# Altium PCB SAMV71_Xplained_Ultra.PcbDoc (part 3 of 7)
Units mm, origin at the board's own origin, x right, y up, seen from the top; angles counter-clockwise.
Board outline 90 x 135 mm, 8 copper layers (Top Layer LF-Signals, Ground Plane 1 (GND), Power Plane (VCC), Ground Plane 2 (GND), Signal Layer 1, Signal Layer 2, Ground Plane 3 (GND), Bottom Layer LF-Signals), stack 1.588 mm thick; 391 components, 330 nets, 1782 pads, 966 vias.
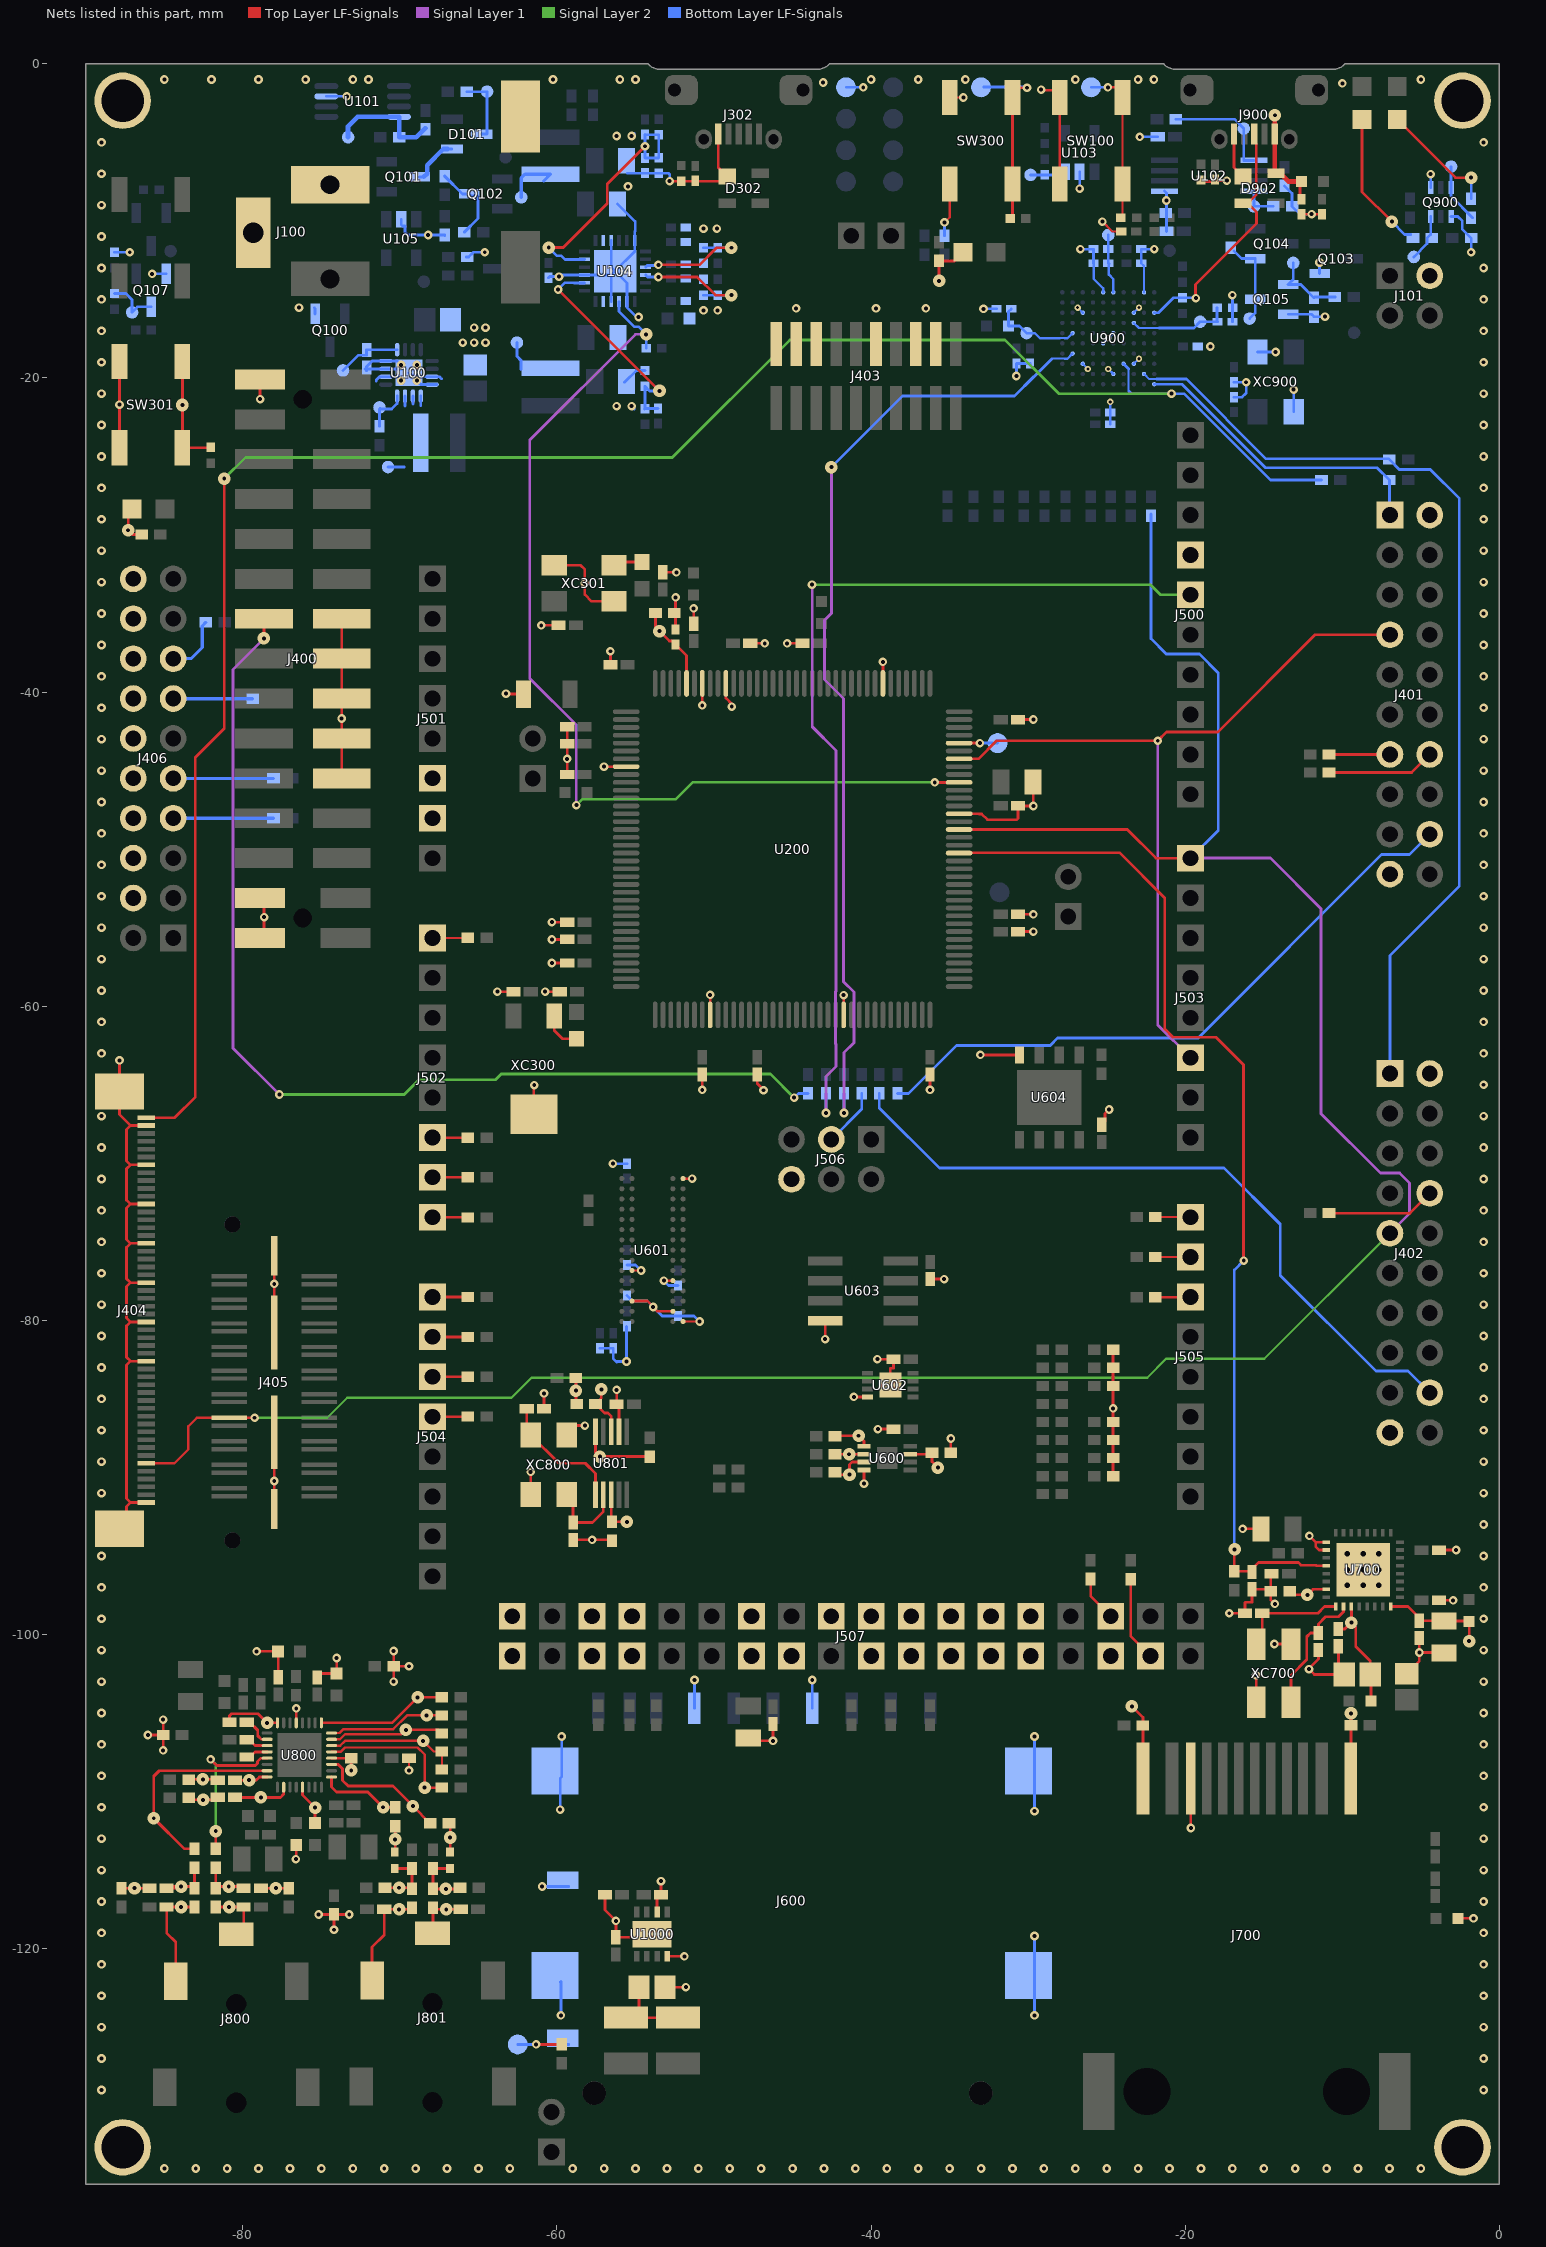
[diagram p9: the nets of this part, all layers, seen from the top]

## Via types
v1: diameter 0.55, hole 0.25, Top Layer LF-Signals to Bottom Layer LF-Signals, 547 vias
v2: diameter 0.55, hole 0.25, Top Layer LF-Signals to Bottom Layer LF-Signals, tented both sides, 190 vias
v3: diameter 0.55/0.55/0.55/0.8 (per signal layer), hole 0.25, Top Layer LF-Signals to Bottom Layer LF-Signals, tented top, 172 vias
v4: diameter 0.55, hole 0.25, Top Layer LF-Signals to Bottom Layer LF-Signals, tented top, 21 vias
v5: diameter 0.4, hole 0.2, Top Layer LF-Signals to Bottom Layer LF-Signals, tented both sides, 16 vias
v6: diameter 0.7, hole 0.35, Top Layer LF-Signals to Bottom Layer LF-Signals, 9 vias
v7: diameter 0.4, hole 0.2, Top Layer LF-Signals to Bottom Layer LF-Signals, tented top, 5 vias
v8: diameter 0.66, hole 0.33, Top Layer LF-Signals to Bottom Layer LF-Signals, tented top, 4 vias
v9: diameter 0.4, hole 0.2, Top Layer LF-Signals to Bottom Layer LF-Signals, 2 vias

## Nets (pads, with @x,y where several pads share a name; then routed paths per layer and width w, separated by ;. In a path a pad name is that pad's centre, name@x,y a point inside that pad or via, vN(x,y) a via of type N, cw(c..) or ccw(c..) an arc to the next point about the centre after c; other vN are vias at no path point) (continued)
EDBG_USB_HS_P: D902.2 J900.3 R917.1 U900.A8 | length 15.3
  Top Layer LF-Signals w0.175: D902.2@-15.975,-8.828 -15.475,-8.328 -15.475,-5.1 J900.3@-15.575,-5
  Top Layer LF-Signals w0.18: v1(-19.325,-14.925) -19.352,-14.898 -19.352,-14.053 -15.475,-10.176 -15.475,-9.428 -15.935,-8.968 -16.235,-8.968 D902.2@-16.325,-8.878
  Bottom Layer LF-Signals w0.18: U900.A8@-21.975,-15.85 -21.7,-15.85 -20.75,-14.9 R917.1@-20.175,-14.9 -19.35,-14.9 v1(-19.325,-14.925)
GND: C100.2 C101.2 C102.2 C103.2 C104.2 C105.2 C106.2 C107.2 C108.2 C109.2 C110.2 C111.2 C112.2 C113.2 C115.2 C117.2 C118.2 C119.2 C120.2 C200.2 C201.2 C202.2 C203.2 C204.2 C205.2 C206.2 C207.2 C208.2 C209.2 C210.2 C211.2 C212.2 C213.2 C214.2 C215.2 C216.2 C217.2 C218.2 C219.2 C300.2 C301.2 C302.2 C303.2 C304.1 C600.2 C601.2 C602.2 C603.2 C604.2 C605.2 C606.2 C607.2 C608.2 C609.2 C610.2 C611.2 C612.2 C613.2 C700.2 C701.2 C702.2 C703.2 C704.1 C707.2 C708.2 C709.1 C710.2 C711.2 C712.2 C713.2 C800.1 C811.2 C818.2 C819.2 C822.2 C823.2 C824.2 C828.2 C829.2 C900.2 C901.2 C902.2 C903.1 C904.2 C905.2 C906.2 C907.2 C908.2 C909.2 C910.2 C911.2 C912.2 C913.2 C914.2 C915.2 C1000.2 C1001.2 C1002.2 C1003.2 D302.1 D902.1 J100.1 J100.2 J101.2@-4.43,-13.49 J302.5 J400.2 J400.4 J400.9 J400.11 J400.13 J400.15 J400.17 J400.30 J401.2@-4.43,-28.73 J401.19@-6.97,-51.59 J402.2@-4.43,-64.29 J402.19@-6.97,-87.15 J403.3 J403.5 J403.9 J403.15 J403.17 J403.19 J404.0 J404.2 J404.7 J404.12 J404.17 J404.22 J404.27 J404.32 J404.50 J405.41 J405.42 J405.43 J405.44 J406.4@-86.98,-53.114 J406.6@-86.98,-50.574 J406.8@-86.98,-48.034 J406.10@-86.98,-45.494 J406.12@-86.98,-42.954 J406.14@-86.98,-40.414 J406.16@-86.98,-37.874 J406.18@-86.98,-35.334 J406.20@-86.98,-32.794 J500.7@-19.67,-31.27 J501.6@-67.93,-45.494 J501.7@-67.93,-48.034 J506.6@-45.07,-71.021 J507.35 J507.36 J600.3 J600.6 J600.11 J600.13 J600.14 J600.15 J600.16 J700.10 J900.5 L702.1 pad.666 Q100.1 Q103.1 Q105.2 Q107.2 Q900.1 Q900.4 R103.1 R111.1 R116.1 R117.1 R118.1 R119.1 R123.1 R126.2 R130.1 R131.1 R133.1 R135.1 R233.1 R304.1 R603.1 R704.1 R714.2 R715.2 R716.2 R717.2 R718.1 R719.2 R720.2 R814.1 R815.1 R816.1 R818.1 R909.1 R918.1 R919.1 SW100.1 SW100.2 SW300.1 SW300.2 SW301.1 SW301.2 TP900.1 U100.0 U100.6 U100.7 U100.8 U100.15 U100.16 U101.3 U102.5 U103.2 U104.2 U104.4 U104.9 U104.15 U104.18 U104.25 U105.2 U200.8 U200.44 U200.61 U200.95 U200.115 U200.135 U200.138 U600.4 U601.A1 U601.B2 U601.C6 U601.E2 U601.F6 U601.R1 U602.4 U602.9 U603.4 U604.4 U700.25 U700.26 U700.33 U800.5 U801.2 U900.B10 U900.C3 U900.C8 U900.E2 U900.E6 U900.F5 U900.F10 U900.H3 U900.H8 U1000.2 U1000.8 U1000.9 XC300.3 XC301.2 XC301.4 XC700.2 XC700.4 XC800.2 XC800.4 XC900.2 XC900.4 | length 347.2
  Top Layer LF-Signals w0.15: v1(-69.425,-108.65) C800.1@-69.425,-107.875 ; U601.F6@-55.222,-76.825 v1(-54.647,-76.825) ; C302.2@-53.275,-32.375 v1(-52.4,-32.375) ; v1(-53.197,-77.475) U601.E2@-52.622,-77.475 ; U601.A1@-51.972,-80.075 v1(-50.922,-80.075) ; U601.R1@-51.972,-70.975 v1(-51.397,-70.975) ; v1(-35.325,-10.1) -35,-9.775 SW300.1@-35,-7.65 ; SW300.2@-35,-2.15 v4(-34.125,-2.15) ; v4@-29.175,-1.675 -28,-1.675 SW100.2@-28,-2.15 SW100.1@-28,-7.65 ; v1(-25.275,-10.05) -24.65,-10.675 C104.2@-24.075,-10.675 ; C907.2@-12.6,-9.575 v2(-11.95,-9.575) C908.2@-11.3,-9.575
  Top Layer LF-Signals w0.175: J404.0@-87.85,-93.27 -87.4,-92.82 -87.4,-91.85 -87.15,-91.6 ; v1(-87.85,-63.45) J404.0@-87.85,-65.43 -87.85,-66.9 -87.15,-67.6 ; SW301.1@-87.85,-24.45 v1(-87.85,-21.7) SW301.2@-87.85,-18.95 ; J404.50@-86.15,-91.6 -87.15,-91.6 ; J404.32@-86.15,-82.6 -87.15,-82.6 ; J404.27@-86.15,-80.1 -87.15,-80.1 ; J404.22@-86.15,-77.6 -87.15,-77.6 ; J404.17@-86.15,-75.1 -87.15,-75.1 ; J404.12@-86.15,-72.6 -87.15,-72.6 ; J404.7@-86.15,-70.1 -87.15,-70.1 ; J404.2@-86.15,-67.6 -87.15,-67.6 ; v1(-86.05,-106.4) R814.1@-85.075,-106.4 ; v1(-85.075,-107.375) R814.1@-85.075,-106.4 ; v1(-85.075,-105.425) R814.1@-85.075,-106.4 ; v1(-79.125,-101.075) C828.2@-77.749,-101.075 ; v1(-78.903,-21.347) J400.30@-78.903,-20.094 ; v1@-78.65,-54.328 J400.4@-78.65,-53.075 ; J400.2@-78.647,-55.398 v1(-78.647,-54.331) ; J405.41@-78,-92.015 J405.42@-78,-87.125 ; J405.43@-78,-80.775 v1(-78,-77.675) J405.44@-78,-75.885 ; C829.2@-77.75,-102.725 C828.2@-77.75,-101.327 ; v1(-76.625,-114.3) -76.6,-114.275 C811.2@-76.6,-113.399 ; U800.5@-76.6,-105.625 v1(-76.6,-104.7) ; C818.2@-75.25,-102.733 -75.001,-102.484 C819.2@-74.025,-102.484 v1(-74.025,-101.5) ; v1(-75.175,-117.825) R815.1@-74.2,-117.825 ; v1(-74.2,-118.8) R815.1@-74.2,-117.825 ; J400.9@-73.708,-45.494 J400.11@-73.708,-42.954 v1(-73.708,-41.684) J400.13@-73.708,-40.414 J400.15@-73.708,-37.874 J400.17@-73.708,-35.334 ; v1(-73.225,-117.825) R815.1@-74.2,-117.825 ; v1(-70.4,-103) R816.1@-70.4,-102.025 ; v1(-70.4,-101.05) R816.1@-70.4,-102.025 ; v1(-69.425,-102.025) R816.1@-70.4,-102.025 ; v1(-63.8,-59.075) C301.2@-62.775,-59.075 ; v1(-63.25,-40.1) -63.225,-40.125 C215.2@-62.125,-40.125 ; XC800.2@-61.675,-91.1 v1(-61.675,-89.65) ; XC300.3@-61.475,-66.875 -61.475,-65.05 v1(-61.45,-65.025) ; v1(-61,-35.75) C303.2@-59.9,-35.75 ; C824.2@-60.825,-85.625 v1(-60.825,-84.65) ; v1(-60.75,-59.075) C300.2@-59.825,-59.075 ; v1(-60.325,-57.25) C210.2@-59.35,-57.25 ; v1(-60.325,-55.75) C201.2@-59.35,-55.75 ; v1(-60.325,-54.65) C209.2@-59.35,-54.65 ; XC301.4@-60.175,-31.925 -58.5,-31.925 -58.225,-32.2 v1(-58.225,-33.075) -58.225,-33.8 -57.8,-34.225 XC301.2@-56.375,-34.225 ; XC800.4@-59.375,-87.3 -58.775,-86.7 v1(-58.225,-86.7) ; C218.2@-59.35,-45.25 v1(-59.35,-44.25) C200.2@-59.35,-43.3 C208.2@-59.35,-42.2 ; C823.2@-58.975,-93.975 v1(-57.762,-93.975) -56.55,-93.975 R818.1@-56.5,-94.025 ; v1(-57.003,-44.752) -57.001,-44.75 U200.8@-55.6,-44.75 ; C1001.2@-56.95,-116.58 -56.95,-117.53 v1(-56.25,-118.23) C1003.2@-56.25,-119.28 -54.15,-119.28 U1000.9@-53.95,-119.08 ; C207.2@-56.6,-38.25 v1(-56.6,-37.4) ; v1(-56.2,-84.425) C822.2@-56.2,-85.35 -56.05,-85.5 U801.2@-56.05,-87.1 ; U601.C6@-55.222,-78.775 -54.25,-78.775 v1(-53.875,-79.15) -53.6,-79.425 U601.B2@-52.622,-79.425 ; U1000.2@-53.625,-117.668 -53.625,-116.83 C1002.2@-53.375,-116.58 v1(-53.375,-115.705) ; C1000.2@-53.125,-122.455 -51.805,-122.455 v1(-51.8,-122.45) ; U1000.8@-52.975,-120.492 v1(-51.887,-120.492) ; v1(-52.825,-7.475) -52.822,-7.478 R304.1@-52.1,-7.478 D302.1@-49.459,-7.478 ; C219.2@-52.45,-36.025 v1@-52.45,-33.95 ; C217.2@-51.3,-35.65 v1(-51.3,-34.675) ; v1(-50.75,-65.325) C202.2@-50.75,-64.35 ; v1(-50.75,-40.85) U200.138@-50.75,-39.45 ; U200.44@-50.25,-60.55 v1(-50.25,-59.275) ; J302.5@-49.734,-5.15 -49.734,-6.603 D302.1@-49.159,-7.178 ; U200.135@-49.25,-39.45 -49.25,-40.375 -48.875,-40.75 v1(-48.875,-40.925) ; C612.2@-47.823,-106.582 -47.635,-106.77 v1(-46.248,-106.77) C613.2@-46.248,-105.7 ; C206.2@-47.7,-36.9 v1(-46.775,-36.9) ; C211.2@-47.25,-64.35 -47.25,-64.925 -46.85,-65.325 v1(-46.85,-65.35) ; v1(-45.35,-36.9) C214.2@-44.375,-36.9 ; v1(-42.925,-81.2) U603.4@-42.925,-80.03 ; U200.61@-41.75,-60.55 v1(-41.75,-59.3) ; v1(-41.1,-84.875) U602.4@-40.225,-84.875 ; v1(-40.45,-90.4) U600.4@-40.45,-89.525 ; v1(-39.6,-82.475) C601.2@-38.575,-82.475 -38.575,-83.05 -38.775,-83.05 U602.9@-38.775,-84.125 ; v1(-39.575,-86.925) C600.2@-38.575,-86.925 ; v1(-36.25,-65.325) C203.2@-36.25,-64.35 ; C602.2@-36.225,-77.375 v1(-35.35,-77.375) ; R603.1@-34.925,-88.425 v1(-34.925,-87.525) ; U200.95@-34.4,-47.75 -33.15,-47.75 -33.137,-47.763 -32.962,-47.763 -32.6,-48.125 -30.725,-48.125 -30.65,-48.05 C205.2@-30.65,-47.25 v1(-29.675,-47.25) C216.2@-29.675,-45.743 ; v1(-33.05,-63.1) U604.4@-30.555,-63.1 U604.4@-30.575,-63.12 ; C204.2@-30.65,-55.25 v1(-29.675,-55.25) ; C212.2@-30.65,-54.15 v1(-29.675,-54.15) ; C213.2@-30.65,-41.75 v1(-29.675,-41.75) ; C611.2@-25.325,-67.55 -25.113,-67.338 -25.113,-66.838 v1(-24.85,-66.575) ; R717.2@-24.594,-89.923 R720.2@-24.594,-87.623 R714.2@-24.594,-86.473 v1(-24.594,-85.6) R715.2@-24.594,-83.023 R716.2@-24.594,-81.873 ; v1(-19.645,-112.32) J700.10@-19.645,-109.175 ; R919.1@-19,-7.4 -18.9,-7.5 C903.1@-18.1,-7.5 ; C903.1@-18.1,-7.375 -17.975,-7.5 -17.917,-7.442 v1(-17.348,-7.442) ; v1(-17.2,-98.65) C709.1@-16.2,-98.65 -16.2,-97.975 -16.175,-97.95 -15.75,-97.95 C713.2@-15.75,-97.125 -14.675,-97.125 R704.1@-14.55,-97.25 ; J900.5@-16.9,-4.475 -16.9,-6.603 D902.1@-16.325,-7.178 D902.1@-16.647,-7.5 ; v1(-16.35,-93.275) C712.2@-15.182,-93.275 ; v1(-15.494,-102.591) -15.476,-102.608 XC700.4@-15.476,-104.314 ; C711.2@-14.5,-96.125 -14.55,-96.175 R704.1@-14.55,-97.25 ; v1(-14.326,-100.609) -14.321,-100.614 XC700.2@-13.276,-100.614 ; v1(-14.3,-98.05) -14.55,-97.8 R704.1@-14.55,-97.25 ; v1(-12.1,-93.725) -11.7,-94.125 ; C704.1@-11.525,-101 -11.525,-101.568 -12.126,-102.169 v1(-12.126,-102.205) -11.781,-102.55 C701.2@-9.875,-102.55 -10.25,-102.175 C700.2@-10.25,-100.75 ; U700.26@-11.025,-94.625 -11.475,-94.625 -11.7,-94.4 -11.7,-94.125 ; U700.25@-11.025,-94.125 -11.7,-94.125 ; C703.2@-5.9,-102.5 -5.1,-101.7 v1(-5.1,-101.15) ; C707.2@-5.1,-100.225 v1(-5.1,-101.15) ; C710.2@-3.85,-97.825 v1(-2.95,-97.825) ; C702.2@-3.85,-94.625 v1(-2.75,-94.625) ; C708.2@-3.793,-101.15 v1(-5.1,-101.15) ; C708.2@-3.668,-101.2 C708.2@-3.575,-101.107 ; L702.1@-2.625,-118.075 v1(-1.65,-118.075) ; -87.15,-91.6 -87.4,-91.35 -87.4,-82.85 -87.15,-82.6 ; -87.15,-82.6 -87.4,-82.35 -87.4,-80.35 -87.15,-80.1 ; -87.15,-80.1 -87.4,-79.85 -87.4,-77.85 -87.15,-77.6 ; -87.15,-77.6 -87.4,-77.35 -87.4,-75.35 -87.15,-75.1 ; -87.15,-75.1 -87.4,-74.85 -87.4,-72.85 -87.15,-72.6 ; -87.15,-72.6 -87.4,-72.35 -87.4,-70.35 -87.15,-70.1 ; -87.15,-70.1 -87.4,-69.85 -87.4,-67.85 -87.15,-67.6
  Top Layer LF-Signals w0.185: U200.115@-39.25,-39.45 v1(-39.25,-38.075)
  Bottom Layer LF-Signals w0.15: TP900.1@-41.6,-1.5 v4(-40.5,-1.5) ; v7(-26.85,-15.525) U900.H8@-26.525,-15.85 ; v1(-26.725,-7.95) U103.2@-26.725,-6.875 ; U900.H3@-26.525,-19.1 v5(-26.2,-19.425) ; C906.2@-25.85,-12.7 -25.825,-12.725 -25.825,-13.701 -25.225,-14.301 U900.F10@-25.225,-14.55 ; v7(-24.9,-19.425) U900.E2@-24.575,-19.75 ; U900.C3@-23.275,-19.1 v5(-22.95,-18.775) ; U900.C8@-23.275,-15.85 v7(-22.95,-15.525) ; C910.2@-22.8,-12.7 -22.625,-12.875 U900.B10@-22.625,-14.55
  Bottom Layer LF-Signals w0.175: R131.1@-88.175,-12 v1(-87.2,-12) ; v1(-85.775,-13.375) Q107.2@-84.875,-13.375 ; Q100.1@-75.45,-15.525 -75.4,-15.575 Q100.1@-75.4,-15.925 ; U101.3@-74.687,-2.075 v1(-73.375,-2.075) ; C102.2@-72.226,-19.426 C102.2@-72.125,-19.325 ; C102.2@-72.125,-19.55 C102.2@-72.125,-19.325 ; C102.2@-72.025,-19.425 U100.7@-70.9,-19.425 U100.0@-69.675,-19.425 ; -71.505,-20.205 -71.505,-20.12 -71.31,-19.925 U100.6@-70.9,-19.925 U100.0@-69.675,-19.925 ; U100.0@-70.175,-18.925 U100.8@-70.9,-18.925 -71.762,-18.925 -72.125,-19.287 C102.2@-72.125,-19.325 ; U105.2@-69.92,-9.9 -69.92,-10.237 -69.832,-10.325 -69.679,-10.325 -69.679,-10.724 -69.503,-10.9 v1(-68.2,-10.9) R111.1@-67.15,-10.9 R111.1@-67.15,-10.928 ; U100.0@-69.425,-19.675 U100.0@-69.175,-19.925 ; U100.16@-67.65,-20.425 U100.16@-67.95,-20.425 -68.675,-20.425 v1(-68.925,-20.175) U100.0@-69.175,-19.925 ; -67.345,-20.058 -67.477,-19.925 U100.15@-67.95,-19.925 U100.0@-69.175,-19.925 ; R135.1@-65.778,-12.3 R135.1@-65.725,-12.3 -65.625,-12.3 -65.325,-12 v1(-64.6,-12) ; v1(-60.95,-116.05) J600.11@-59.25,-116.05 ; C108.2@-60.55,-13.625 -60.475,-13.55 v1(-59.875,-13.55) -59.775,-13.45 U104.9@-58.25,-13.45 U104.25@-56.55,-13.45 ; v1(-59.8,-111.15) J600.13@-59.8,-109.15 ; J600.14@-59.79,-122.14 -59.75,-122.1 v1(-59.75,-124.25) ; J600.13@-59.75,-109.1 -59.7,-109.05 v1(-59.7,-106.5) ; C603.2@-57.272,-81.775 C604.2@-56.422,-81.775 -56.422,-82.428 -56.2,-82.65 -56.172,-82.622 -55.575,-82.622 -55.575,-80.403 C605.2@-55.572,-80.4 ; U104.4@-56.55,-15.15 U104.25@-56.55,-13.45 ; U104.15@-56.55,-11.25 -56.55,-12.95 U104.25@-56.3,-13.2 ; v1(-56.447,-70.025) C610.2@-55.547,-70.025 ; C113.2@-56.143,-8.925 -55.025,-10.043 -55.025,-10.642 -55.05,-10.667 U104.18@-55.05,-11.25 -55.05,-11.95 U104.25@-56.3,-13.2 ; C115.2@-55.7,-20.275 -54.95,-19.525 R123.1@-54.4,-19.525 ; C608.2@-55.547,-78.425 -55.197,-78.775 -54.25,-78.775 v1(-53.875,-79.15) -53.3,-79.725 C606.2@-52.297,-79.725 -51.272,-79.725 v1(-50.922,-80.075) ; C609.2@-55.547,-76.475 -54.997,-76.475 v1(-54.647,-76.825) ; C117.2@-55.525,-6.975 R126.2@-53.525,-6.975 -52.9,-6.975 -52.825,-7.05 v1(-52.825,-7.475) ; v1(-55.475,-7.8) -55.45,-7.775 v1@-55.45,-7.75 ; v1@-55.325,-21.875 v1(-55.25,-21.8) v1@-55.075,-21.975 ; v1(-55.25,-4.6) v1@-55.075,-4.425 ; v1@-54.925,-16.15 -54.925,-16.132 v1@-54.932,-16.125 ; v1(-54.8,-16.125) v1@-54.932,-16.125 ; v1(-53.197,-77.475) -52.897,-77.775 C607.2@-52.297,-77.775 ; J600.6@-51.248,-104.7 v1(-51.248,-102.9) ; J600.3@-43.748,-104.7 v1(-43.748,-102.9) ; R103.1@-35.325,-10.95 v1(-35.325,-10.1) ; v2(-32.85,-15.6) C904.2@-32.025,-15.6 ; v2(-30.75,-19.875) C914.2@-30.75,-19.075 C913.2@-29.875,-19.075 ; v1(-29.6,-124.25) v1(-29.6,-119.2) ; v1(-29.6,-111.25) v1(-29.6,-106.5) ; v2(-26.675,-11.8) C905.2@-25.85,-11.8 C906.2@-25.85,-12.7 ; U900.F5@-25.225,-17.8 v5(-24.9,-17.475) U900.E6@-24.575,-17.15 ; C915.2@-24.775,-22.95 C912.2@-24.775,-22.2 v5(-24.775,-21.525) ; v1(-22.9,-4.65) C105.2@-21.75,-4.65 ; C910.2@-22.8,-12.7 C909.2@-22.8,-11.8 v2(-21.975,-11.8) ; U102.5@-21.325,-8.1 -21.2,-8.225 C106.2@-21.2,-10.675 ; C902.2@-17,-16.425 v1@-17,-14.727 ; C902.2@-16.975,-16.4 R918.1@-16.975,-15.525 ; C900.2@-16.9,-21.225 -16.375,-21.225 -16.125,-20.975 v4(-16.125,-20.275) C901.2@-16.9,-20.275 ; XC900.2@-15.4,-18.35 v1(-14.25,-18.35) ; R116.1@-13.675,-7.775 -13.2,-8.25 R118.1@-13.2,-9.075 -12.7,-9.575 v2(-11.95,-9.575) ; Q105.2@-13.45,-15.95 -11.95,-15.95 R119.1@-11.8,-16.1 v4(-11.1,-16.1) ; XC900.4@-13.1,-22.15 v1(-13.1,-20.75) ; Q103.1@-11.45,-13.35 v4(-11.45,-12.65) ; Q900.1@-4.375,-7.875 v4(-4.375,-7.025) ; Q900.4@-3.075,-9.725 -2.65,-9.725 -2.362,-10.012 -2.362,-10.538 R909.1@-1.8,-11.1 v1(-1.8,-12) ; U104.25@-56.55,-13.45 U104.25@-56.3,-13.2 ; U104.25@-56.3,-13.2 -55.55,-13.95 U104.2@-55.55,-15.15 -55.55,-15.507 v1@-54.932,-16.125
  other v1: -78,-90.225 -55.575,-82.625 -52.45,-33.975 -56.2,-21.8 -69.925,-20.175 -69.925,-19.175 -68.925,-19.175 -66,-17.75 -65.275,-17.75 -64.55,-17.75 -65.275,-16.8 -64.55,-16.8 -50.675,-15.7 -49.775,-15.7 -76.425,-15.525 -17.001,-14.726 -50.675,-10.5 -49.825,-10.5 -21.2,-8.7 -56.2,-4.6
  other v2: -85,-134 -83,-134 -81,-134 -79,-134 -77,-134 -75,-134 -73,-134 -71,-134 -69,-134 -67,-134 -65,-134 -63,-134 -59,-134 -57,-134 -55,-134 -53,-134 -51,-134 -49,-134 -47,-134 -45,-134 -43,-134 -41,-134 -39,-134 -37,-134 -35,-134 -33,-134 -31,-134 -29,-134 -27,-134 -25,-134 -23,-134 -21,-134 -19,-134 -17,-134 -15,-134 -13,-134 -11,-134 -9,-134 -7,-134 -5,-134 -89,-129 -1,-129 -89,-127 -1,-127 -89,-125 -1,-125 -89,-123 -1,-123 -89,-121 -1,-121 -89,-119 -1,-119 -89,-117 -1,-117 -89,-115 -1,-115 -89,-113 -1,-113 -89,-111 -1,-111 -89,-109 -1,-109 -89,-107 -1,-107 -89,-105 -1,-105 -89,-103 -1,-103 -89,-101 -1,-101 -89,-99 -1,-99 -89,-97 -1,-97 -89,-95 -1,-95 -1,-93 -89,-91 -1,-91 -89,-89 -1,-89 -89,-87 -1,-87 -89,-85 -1,-85 -89,-83 -1,-83 -89,-81 -1,-81 -89,-79 -1,-79 -89,-77 -1,-77 -89,-75 -1,-75 -89,-73 -1,-73 -89,-71 -1,-71 -89,-69 -1,-69 -89,-67 -1,-67 -1,-65 -89,-63 -1,-63 -89,-61 -1,-61 -89,-59 -1,-59 -89,-57 -1,-57 -89,-55 -1,-55 -89,-53 -1,-53 -89,-51 -1,-51 -89,-49 -1,-49 -89,-47 -1,-47 -89,-45 -1,-45 -89,-43 -1,-43 -89,-41 -1,-41 -89,-39 -1,-39 -89,-37 -1,-37 -89,-35 -1,-35 -89,-33 -1,-33 -89,-31 -1,-31 -89,-29 -1,-29 -89,-27 -1,-27 -89,-25 -1,-25 -89,-23 -1,-23 -89,-21 -1,-21 -89,-19 -1,-19 -89,-17 -1,-17 -44.77,-15.568 -39.69,-15.568 -36.515,-15.568 -89,-15 -1,-15 -89,-13 -1,-13 -89,-11 -89,-9 -89,-7 -89,-5 -1,-5 -10,-1.25 -43.051,-1.189 -85,-1 -82,-1 -79,-1 -76,-1 -73,-1 -72,-1 -60.25,-1 -56,-1 -55,-1 -40,-1 -37,-1 -34,-1 -27,-1 -23,-1 -22,-1 -5,-1
  other v4: -18.4,-18 -29.175,-1.65
  other v6: -9.675,-96.875 -8.675,-96.875 -7.675,-96.875 -9.675,-95.875 -8.675,-95.875 -7.675,-95.875 -9.675,-94.875 -8.675,-94.875 -7.675,-94.875
ID1: J401.1@-6.97,-28.73 R903.1 U900.A1 | length 19.7
  Bottom Layer LF-Signals w0.15: U900.A1@-21.975,-20.4 -20.2,-20.4
  Bottom Layer LF-Signals w0.175: -20.2,-20.4 -14.875,-25.725 -7.775,-25.725 R903.1@-7,-26.5 -7,-28.7 J401.1@-6.97,-28.73
ID2: J402.1@-6.97,-64.29 R902.1 U900.B2 | length 61.8
  Bottom Layer LF-Signals w0.125: U900.B2@-22.625,-19.75 -22.295,-20.08 -22.11,-20.08 -22.108,-20.078 -21.824,-20.078
  Bottom Layer LF-Signals w0.15: -21.828,-20.075 -21.824,-20.078 ; R902.1@-7.05,-25.15 R902.1@-7,-25.2
  Bottom Layer LF-Signals w0.175: -21.828,-20.075 -19.922,-20.075 -14.847,-25.15 R902.1@-7.05,-25.15 ; R902.1@-7,-25.2 -6.375,-25.825 -4.4,-25.825 -2.55,-27.675 -2.55,-52.35 -6.97,-56.77 J402.1@-6.97,-64.29
ID4: J404.1 R901.1 U900.D3 | length 125.7
  Top Layer LF-Signals w0.175: J404.1@-86.15,-67.1 -84.35,-67.1 -83.025,-65.775 -83.025,-44.15 -81.186,-42.311 v3(-81.186,-26.411)
  Signal Layer 2 w0.175: v3@-81.2,-26.425 v3(-81.186,-26.411) -79.838,-25.063 -52.663,-25.063 -45.178,-17.578 -31.476,-17.578 -28.054,-21 v1(-20.875,-21)
  Bottom Layer LF-Signals w0.125: -23.6,-20.825 -23.6,-19.425
  Bottom Layer LF-Signals w0.175: U900.D3@-23.925,-19.1 -23.6,-19.425 ; -23.6,-20.825 -23.425,-21 -20.075,-21 -14.575,-26.5 R901.1@-11.325,-26.5
JTAGSEL: TP201.1 U200.104 | length 2.4
  Top Layer LF-Signals w0.175: U200.104@-34.4,-43.25 v1(-33.075,-43.25)
  Bottom Layer LF-Signals w0.175: v1(-33.075,-43.25) TP201.1@-31.95,-43.25
MAC24_A0: R602.1 U600.1 | length 2.3
  Top Layer LF-Signals w0.175: R602.1@-42.3,-87.375 -42.275,-87.35 v3(-40.8,-87.35) -40.45,-87.7 U600.1@-40.45,-88.025
MAC24_A1: R601.1 U600.2 | length 1.9
  Top Layer LF-Signals w0.175: R601.1@-42.3,-88.525 U600.2@-40.45,-88.525
  other v3: -41.4,-88.525
MAC24_A2: R600.1 U600.3 | length 2.6
  Top Layer LF-Signals w0.175: R600.1@-42.3,-89.675 -42.15,-89.825 v3(-41.375,-89.825) -41.375,-89.175 -41.225,-89.025 U600.3@-40.45,-89.025
MAC24_WP: R603.2 U600.7 | length 2.5
  Top Layer LF-Signals w0.175: U600.7@-37.5,-88.525 -36.5,-88.525 R603.2@-36.2,-88.225 ; R603.2@-36.125,-88.425 -36.125,-89 v3(-35.75,-89.375)
NetC102_1: C102.1 pad.2 U100.9 | length 4.2
  Bottom Layer LF-Signals w0.175: pad.2@-73.625,-19.525 -72.65,-18.55 -72.125,-18.55 C102.1@-72.125,-18.225 ; C102.1@-72.125,-18.2 U100.9@-70.175,-18.2
NetC114_2: C114.2 R122.1 R123.2 U104.8 | length 14.3
  Top Layer LF-Signals w0.175: v1(-59.928,-14.374) -53.477,-20.825 v3(-53.475,-20.825)
  Bottom Layer LF-Signals w0.175: v1(-59.928,-14.374) -59.491,-13.937 -58.915,-13.937 -58.903,-13.95 U104.8@-58.25,-13.95 ; R122.1@-54.425,-21.975 R122.1@-54.4,-21.95 ; C114.2@-53.575,-21.95 R122.1@-54.4,-21.95 ; v3(-53.475,-20.825) -54.1,-20.825 R123.2@-54.4,-20.525 R122.1@-54.4,-21.95
NetC116_2: C116.2 C118.1 R124.1 R126.1 U104.11 | length 16.8
  Top Layer LF-Signals w0.175: v3(-60.525,-11.7) -59.602,-11.7 -56.8,-8.898 -56.8,-7.65 v1(-54.4,-5.25)
  Bottom Layer LF-Signals w0.175: v3(-60.525,-11.7) -60,-12.225 -59.725,-12.225 -59.487,-12.463 -58.263,-12.463 U104.11@-58.25,-12.45 ; C116.2@-54.4,-4.5 v1(-54.4,-5.25) C118.1@-54.4,-6 R126.1@-53.55,-6 ; C116.2@-54.375,-4.525 R124.1@-53.525,-4.525 R126.1@-53.525,-5.975
NetC219_1: C219.1 R233.2 U200.140 | length 5.4
  Top Layer LF-Signals w0.175: R233.2@-53.728,-34.968 -53.728,-35.872 v3(-53.475,-36.125) -52.85,-36.75 -52.675,-36.75 C219.1@-52.45,-36.975 -51.75,-37.675 U200.140@-51.75,-39.45
NetC700_1: C700.1 C701.1 L700.2 U700.3 | length 7.5
  Top Layer LF-Signals w0.18: C700.1@-10.25,-99.65 -9.85,-99.65 -9.45,-99.25 v3(-9.425,-99.25) ; U700.3@-9.425,-98.225 v3(-9.425,-99.25) ; L700.2@-8.175,-104.225 -8.175,-102.6 C701.1@-8.225,-102.55 -8.225,-101.698 -9.149,-100.774 -9.149,-99.526 v3(-9.425,-99.25)
NetC704_2: C704.2 U700.2 XC700.1 | length 8.3
  Top Layer LF-Signals w0.18: XC700.1@-13.276,-104.314 -13.276,-102.601 -12.268,-101.593 -12.268,-100.142 -12.026,-99.9 C704.2@-11.525,-99.9 -11.525,-99.325 -11.075,-98.875 -10.25,-98.875 -9.925,-98.55 U700.2@-9.925,-98.225
NetC707_1: C707.1 C708.1 L701.2 U700.8 | length 6.7
  Top Layer LF-Signals w0.175: U700.8@-6.925,-98.225 -5.825,-98.225 -5.1,-98.95 C707.1@-5.1,-99.125 -3.55,-99.125 C708.1@-3.525,-99.15 -1.95,-99.15 L701.2@-1.925,-99.175 v3(-1.925,-100.425)
NetC709_2: C709.2 U700.1 XC700.3 | length 7
  Top Layer LF-Signals w0.175: XC700.3@-15.476,-100.614 -15.1,-100.237 C709.2@-15.1,-98.65 -11.55,-98.65 -11.125,-98.225 U700.1@-10.425,-98.225
NetC801_1: C801.1 L801.1 R802.2 | length 3.2
  Top Layer LF-Signals w0.175: R802.2@-81.725,-114.85 L801.1@-81.725,-116.15 -81.625,-116.05 v3(-80.9,-116.05) -80.05,-116.05 C801.1@-79.95,-116.15
NetC801_2: C801.2 R807.2 | length 1.8
  Top Layer LF-Signals w0.175: C801.2@-78.85,-116.15 R807.2@-77.075,-116.15
  other v3: -77.9,-116.15
NetC802_1: C802.1 L800.1 R800.2 | length 4.1
  Top Layer LF-Signals w0.175: v3@-83.925,-116.15 C802.1@-84.85,-116.15 -84.75,-116.05 v3(-83.925,-116.05) -83.175,-116.05 L800.1@-83.075,-116.15 R800.2@-83.075,-114.85
NetC802_2: C802.2 R808.2 | length 1.8
  Top Layer LF-Signals w0.175: R808.2@-87.725,-116.15 C802.2@-85.95,-116.15
  other v3: -86.9,-116.15
NetC803_1: C803.1 J800.2 L801.2 | length 3.7
  Top Layer LF-Signals w0.175: L801.2@-81.725,-117.35 C803.1@-79.95,-117.35 -79.95,-118.55 J800.2@-80.45,-119.05
  other v3: -80.875,-117.35
NetC804_1: C804.1 J800.3 L800.2 | length 6.7
  Top Layer LF-Signals w0.175: J800.3@-84.275,-122.075 -84.275,-119.575 -84.85,-119 C804.1@-84.85,-117.35 L800.2@-83.075,-117.35
  other v3: -83.925,-117.35
NetC805_1: C805.1 L802.2 R803.1 R812.2 | length 4
  Top Layer LF-Signals w0.175: R812.2@-70.95,-116.125 L802.2@-69.3,-116.125 ; C805.1@-70.325,-114.9 R803.1@-69.225,-114.9 L802.2@-69.225,-116.2
  other v3: -70.05,-116.125
NetC805_2: C805.2 R806.1 | length 1.7
  Top Layer LF-Signals w0.175: C805.2@-70.325,-113.85 -70.3,-113.825 R806.1@-70.3,-112.2
  other v3: -70.3,-113.05
NetC806_1: C806.1 U800.16 | length 2.1
  Top Layer LF-Signals w0.175: C806.1@-80.5,-109.275 -79.45,-109.275 -79.15,-109.275 -78.95,-109.075 U800.16@-78.45,-109.075
  other v3: -79.6,-109.275
NetC806_2: C806.2 R809.2 | length 1.8
  Top Layer LF-Signals w0.175: R809.2@-83.475,-109.225 C806.2@-81.625,-109.225
  other v3: -82.55,-109.225
NetC807_1: C807.1 U800.18 | length 3.6
  Top Layer LF-Signals w0.175: C807.1@-80.5,-110.375 -77.6,-110.375 -77.4,-110.175 U800.18@-77.4,-109.725
  other v3: -78.85,-110.375
NetC807_2: C807.2 R810.2 | length 2
  Top Layer LF-Signals w0.15: R810.2@-83.45,-110.4 -83.325,-110.525 v3(-82.525,-110.525) -81.75,-110.525 C807.2@-81.6,-110.375
NetC808_1: C808.1 U800.21 | length 2.6
  Top Layer LF-Signals w0.175: U800.21@-76.2,-109.725 -76.2,-110.225 v3(-75.4,-111.025) C808.1@-75.4,-112.002
NetC809_1: C809.1 L803.2 R804.1 R813.2 | length 4.1
  Top Layer LF-Signals w0.175: C809.1@-66.8,-114.9 R804.1@-67.9,-114.9 L803.2@-67.9,-116.2 R813.2@-66.175,-116.2
  other v3: -67.075,-116.2
NetC809_2: C809.2 R811.1 | length 1.8
  Top Layer LF-Signals w0.175: C809.2@-66.8,-113.85 R811.1@-66.8,-112.025
  other v3: -66.8,-112.925
NetC810_1: C810.1 U800.8 | length 3.8
  Top Layer LF-Signals w0.175: C810.1@-80.85,-105.6 -80.85,-105.175 -80.725,-105.05 -79.025,-105.05 v3(-78.45,-105.625) U800.8@-77.8,-105.625
NetC810_2: C810.2 U800.10 | length 2
  Top Layer LF-Signals w0.175: C810.2@-79.75,-105.6 -79.55,-105.6 -79.05,-106.1 -79.05,-106.45 -78.825,-106.675 U800.10@-78.45,-106.675
NetC812_1: C812.1 J801.3 L802.1 | length 6.7
  Top Layer LF-Signals w0.175: J801.3@-71.775,-122.025 -71.775,-119.9 -71,-119.125 C812.1@-71,-117.5 -69.325,-117.5 L802.1@-69.225,-117.4
  other v3: -70.05,-117.5
NetC813_1: C813.1 J801.2 L803.1 | length 3.4
  Top Layer LF-Signals w0.175: J801.2@-67.9,-119 L803.1@-67.9,-117.4 -67.8,-117.5 C813.1@-66.125,-117.5
  other v3: -67.05,-117.5
NetC814_1: C814.1 U800.12 | length 1.4
  Top Layer LF-Signals w0.175: C814.1@-79.75,-107.8 -79.55,-107.8 -79.225,-107.475 U800.12@-78.45,-107.475
NetC815_1: C815.1 U800.11 | length 1.5
  Top Layer LF-Signals w0.175: C815.1@-79.75,-106.7 -79.6,-106.7 -79.225,-107.075 U800.11@-78.45,-107.075
NetC823_1: C823.1 U801.7 XC800.3 | length 5.2
  Top Layer LF-Signals w0.175: XC800.3@-59.375,-91.1 -58.975,-91.5 C823.1@-58.975,-92.875 -57.75,-92.875 -57.05,-92.175 U801.7@-57.05,-91.1
NetC824_1: C824.1 U801.6 XC800.1 | length 8.3
  Top Layer LF-Signals w0.175: C824.1@-61.925,-85.625 -61.925,-87.05 XC800.1@-61.675,-87.3 -59.875,-89.1 -58.2,-89.1 -57.55,-89.75 U801.6@-57.55,-91.1
NetC902_1: C902.1 pad.3@-19.05,-16.425 R918.2 U900.C7 | length 6.5
  Bottom Layer LF-Signals w0.125: -22.95,-16.825 -21.65,-16.825
  Bottom Layer LF-Signals w0.15: U900.C7@-23.275,-16.5 -22.95,-16.825
  Bottom Layer LF-Signals w0.175: -21.65,-16.825 -19.45,-16.825 pad.3@-19.05,-16.425 C902.1@-17.95,-16.425 -17.975,-16.4 R918.2@-17.975,-15.525
NetC904_1: C904.1 L901.2 pad.3@-30.1,-17.15 U900.J6 | length 5.7
  Bottom Layer LF-Signals w0.125: -27.99,-17.471 -27.674,-17.471
  Bottom Layer LF-Signals w0.15: pad.3@-30.1,-17.15 -29.575,-17.15 -29.25,-17.475 -27.99,-17.475 ; -27.678,-17.475 -27.674,-17.471 -27.496,-17.471 U900.J6@-27.175,-17.15
  Bottom Layer LF-Signals w0.175: C904.1@-31.075,-15.6 -31.25,-15.775 L901.2@-31.25,-16.7 -30.55,-16.7 pad.3@-30.1,-17.15
NetC905_1: C905.1 C906.1 pad.3@-24.9,-10.9 U900.E10 | length 3.8
  Bottom Layer LF-Signals w0.15: C906.1@-24.862,-12.738 -24.862,-13.425 -24.575,-13.712 U900.E10@-24.575,-14.55
  Bottom Layer LF-Signals w0.175: pad.3@-24.9,-10.9 C905.1@-24.9,-11.8 C906.1@-24.9,-12.7 C906.1@-24.862,-12.738
NetC907_1: C907.1 D902.4 J900.1 L900.1 | length 6.8
  Top Layer LF-Signals w0.175: C907.1@-12.7,-8.725 L900.1@-12.7,-7.5
  Top Layer LF-Signals w0.3: D902.4@-14.314,-6.978 -14.3,-6.964 J900.1@-14.3,-4.475 v3(-14.3,-3.275) ; D902.4@-14.225,-6.978 -13.947,-6.978 -13.425,-7.5 -12.7,-7.5 L900.1@-12.6,-7.5
NetC1000_1: C1000.1 R1000.1 R1001.2 | length 5.3
  Top Layer LF-Signals w0.18: R1001.2@-55.605,-124.4 R1001.2@-54.775,-124.4 ; C1000.1@-54.78,-122.45 C1000.1@-54.775,-122.455 R1001.2@-54.775,-124.4 ; R1000.1@-52.305,-124.4 R1001.2@-54.775,-124.4
NetD101_1: D101.1 Q101.3 | length 3.1
  Bottom Layer LF-Signals w0.18: Q101.3@-68.75,-7.2 Q101.3@-68.475,-7.2 ; D101.1@-66.975,-5.425 D101.1@-66.7,-5.425
  Bottom Layer LF-Signals w0.3: Q101.3@-68.475,-7.2 -68.263,-6.988 -68.263,-6.458 -67.23,-5.425 D101.1@-66.975,-5.425
NetD101_3: D101.3 pad.0@-64.45,-1.775 R108.1 | length 4.4
  Bottom Layer LF-Signals w0.18: R108.1@-65.75,-1.775 pad.0@-64.45,-1.775 -64.45,-4.475 D101.3@-64.8,-4.475
NetD300_2: D300.2 R302.1 | length 2.4
  Top Layer LF-Signals w0.175: D300.2@-87.055,-28.35 -87.3,-28.595 v3(-87.3,-29.7) -87.031,-29.969 R302.1@-86.45,-29.969
NetD301_2: D301.2 R303.1 | length 3
  Top Layer LF-Signals w0.175: v3(-35.675,-13.825) R303.1@-35.675,-12.55 -34.7,-12.55 D301.2@-34.15,-12
NetD900_1: D900.1 R907.2 | length 8.8
  Top Layer LF-Signals w0.175: D900.1@-8.75,-3.55 -8.75,-8.15 v3(-6.85,-10.05)
  Bottom Layer LF-Signals w0.175: v3(-6.85,-10.05) -6.033,-10.867 R907.2@-5.646,-10.867
NetD901_1: D901.1 R908.2 | length 7.6
  Top Layer LF-Signals w0.175: D901.1@-6.5,-3.55 -2.8,-7.25 v3(-1.8,-7.25)
  Bottom Layer LF-Signals w0.175: R908.2@-1.8,-8.6 v3(-1.8,-7.25)
NetJ300_1: J300.1 XC300.1 | length 2.6
  Top Layer LF-Signals w0.175: XC300.1@-60.175,-60.625 -60.175,-61.55 -59.65,-62.075 J300.1@-58.75,-62.075
NetJ301_1: J301.1 XC301.3 | length 1.9
  Top Layer LF-Signals w0.175: XC301.3@-56.375,-31.925 -56.175,-31.725 J301.1@-54.575,-31.725
NetJ400_18: J400.18 R214.1 | length 67.2
  Top Layer LF-Signals w0.175: v3(-78.661,-36.587) J400.18@-78.661,-35.334
  Signal Layer 1 w0.18: v3@-78.658,-36.59 -80.625,-38.557 -80.625,-62.675 v1(-77.675,-65.625)
  Signal Layer 2 w0.18: v1(-77.675,-65.625) -69.725,-65.625 -68.786,-64.686 -63.911,-64.686 -63.55,-64.325 -46.4,-64.325 v1(-44.9,-65.825)
  Bottom Layer LF-Signals w0.18: v1(-44.9,-65.825) -44.624,-65.549 R214.1@-44.028,-65.549
NetJ401_13: J401.13@-6.97,-43.97 R201.2 | length 3.9
  Top Layer LF-Signals w0.175: R201.2@-10.85,-43.975 J401.13@-6.975,-43.975
NetJ401_14: J401.14@-4.43,-43.97 R202.2 | length 6.9
  Top Layer LF-Signals w0.175: R202.2@-10.85,-45.125 -5.585,-45.125 J401.14@-4.43,-43.97
NetJ401_18: J401.18@-4.43,-49.05 R204.2 | length 40.7
  Bottom Layer LF-Signals w0.18: R204.2@-38.328,-65.549 -37.624,-65.549 -34.575,-62.5 -28.6,-62.5 -28.125,-62.025 -19.175,-62.025 -7.5,-50.35 -5.73,-50.35 J401.18@-4.43,-49.05
NetJ402_8: J402.8@-4.43,-71.91 R209.2 | length 6.9
  Top Layer LF-Signals w0.175: R209.2@-10.85,-73.175 -5.695,-73.175 J402.8@-4.43,-71.91
NetJ402_18: J402.18@-4.43,-84.61 R212.2 | length 45.4
  Bottom Layer LF-Signals w0.18: R212.2@-39.478,-65.549 -39.478,-66.472 -35.65,-70.3 -17.533,-70.3 -13.95,-73.883 -13.95,-77.135 -7.86,-83.225 -5.815,-83.225 J402.18@-4.43,-84.61
NetJ406_7: J406.7@-84.44,-48.034 R400.1 | length 6.4
  Bottom Layer LF-Signals w0.2: J406.7@-84.44,-48.034 R400.1@-78.05,-48.034
NetJ406_9: J406.9@-84.44,-45.494 R401.1 | length 6.4
  Bottom Layer LF-Signals w0.2: J406.9@-84.44,-45.494 R401.1@-78.05,-45.494
NetJ406_13: J406.13@-84.44,-40.414 R403.1 | length 5.1
  Bottom Layer LF-Signals w0.2: J406.13@-84.44,-40.414 -84.433,-40.421 R403.1@-79.377,-40.421
NetJ406_15: J406.15@-84.44,-37.874 R402.1 | length 3.8
  Bottom Layer LF-Signals w0.2: J406.15@-84.44,-37.874 -83.302,-37.874 -82.589,-37.162 -82.589,-35.79 R402.1@-82.359,-35.56
NetJ500_6: J500.6@-19.67,-33.81 R205.2 | length 60.2
  Signal Layer 1 w0.18: v1(-43.765,-33.165) -43.75,-33.18 -43.75,-42.21 -42.237,-43.723 -42.237,-59.044 -42.267,-59.074 -42.267,-62.391 -42.235,-62.423 -42.235,-63.838 -42.875,-64.478 v1(-42.875,-66.8)
  Signal Layer 2 w0.18: v1(-43.765,-33.165) -22.205,-33.165 -21.56,-33.81 J500.6@-19.67,-33.81
  Bottom Layer LF-Signals w0.18: v1@-42.878,-66.797 R205.2@-42.878,-65.549
NetJ502_1: J502.1@-67.93,-55.654 R215.2 | length 2.3
  Top Layer LF-Signals w0.15: J502.1@-67.93,-55.654 -65.685,-55.654 R215.2@-65.675,-55.644
NetJ502_6: J502.6@-67.93,-68.354 R216.2 | length 2.3
  Top Layer LF-Signals w0.175: J502.6@-67.93,-68.354 -67.915,-68.369 R216.2@-65.675,-68.369
NetJ502_7: J502.7@-67.93,-70.894 R217.2 | length 2.3
  Top Layer LF-Signals w0.175: J502.7@-67.93,-70.894 R217.2@-65.675,-70.894
NetJ502_8: J502.8@-67.93,-73.434 R218.2 | length 2.3
  Top Layer LF-Signals w0.175: J502.8@-67.93,-73.434 -67.92,-73.444 R218.2@-65.675,-73.444
NetJ504_1: J504.1@-67.93,-78.514 R219.2 | length 2.3
  Top Layer LF-Signals w0.175: J504.1@-67.93,-78.514 -65.68,-78.514 R219.2@-65.675,-78.519
NetJ504_2: J504.2@-67.93,-81.054 R220.2 | length 2.3
  Top Layer LF-Signals w0.175: J504.2@-67.93,-81.054 -65.69,-81.054 R220.2@-65.675,-81.069
NetJ504_3: J504.3@-67.93,-83.594 R221.2 | length 2.3
  Top Layer LF-Signals w0.175: J504.3@-67.93,-83.594 R221.2@-65.675,-83.594
NetJ504_4: J504.4@-67.93,-86.134 R222.2 | length 2.3
  Top Layer LF-Signals w0.175: J504.4@-67.93,-86.134 -65.69,-86.134 R222.2@-65.675,-86.119
NetJ505_6: J505.6@-19.67,-78.514 R234.2 | length 2.2
  Top Layer LF-Signals w0.175: R234.2@-21.9,-78.525 -19.681,-78.525 J505.6@-19.67,-78.514
NetJ505_7: J505.7@-19.67,-75.974 R208.2 | length 2.2
  Top Layer LF-Signals w0.15: R208.2@-21.9,-75.969 -19.675,-75.969 J505.7@-19.67,-75.974
NetJ505_8: J505.8@-19.67,-73.434 R207.2 | length 2.2
  Top Layer LF-Signals w0.15: R207.2@-21.9,-73.419 -19.685,-73.419 J505.8@-19.67,-73.434
NetJ506_3: J506.3@-42.53,-68.481 R227.2 | length 3.7
  Bottom Layer LF-Signals w0.175: J506.3@-42.53,-68.481 -40.6,-66.551 R227.2@-40.6,-65.55
NetJ507_4: J507.4 R211.2 | length 5.4
  Top Layer LF-Signals w0.175: R211.2@-23.475,-96.475 -23.475,-100.109 J507.4@-22.21,-101.374
NetJ507_5: J507.5 R213.2 | length 2.9
  Top Layer LF-Signals w0.175: R213.2@-26.025,-96.469 -26.025,-97.559 J507.5@-24.75,-98.834
NetJ507_6: J507.6
NetJ507_9: J507.9
NetJ507_10: J507.10
NetJ507_11: J507.11
NetJ507_12: J507.12
NetJ507_13: J507.13
NetJ507_14: J507.14
NetJ507_15: J507.15
NetJ507_16: J507.16
NetJ507_17: J507.17
NetJ507_18: J507.18
NetJ507_19: J507.19
NetJ507_22: J507.22
NetJ507_23: J507.23
NetJ507_24: J507.24
NetJ507_29: J507.29
NetJ507_30: J507.30
NetJ507_31: J507.31
NetJ507_32: J507.32
NetJ600_12: J600.12 R612.1 TP600.1 | length 4.9
  Top Layer LF-Signals w0.175: v1(-61.325,-126.1) R612.1@-59.7,-126.1
  Bottom Layer LF-Signals w0.175: TP600.1@-62.5,-126.1 -60.825,-126.1 J600.12@-59.25,-126.1
NetJ700_1: J700.1 R701.1 | length 4.1
  Top Layer LF-Signals w0.18: J700.1@-9.45,-109.16 R701.1@-9.45,-105.775 v3(-9.45,-105.025)
NetJ700_12: J700.12 R703.2 | length 4.9
  Top Layer LF-Signals w0.18: v3(-23.4,-104.575) -22.7,-105.275 R703.2@-22.7,-105.8 J700.12@-22.7,-109.16
NetL100_1: L100.1 pad.3@-70.75,-25.675 U100.1 U100.2 U100.3 | length 2.8
  Bottom Layer LF-Signals w0.18: pad.3@-70.75,-25.675 -69.725,-25.675 ; -69.675,-21.795 U100.3@-69.675,-21.15 ; -69.175,-21.662 U100.2@-69.175,-21.15 ; -68.675,-21.775 U100.1@-68.675,-21.15
NetL101_1: L101.1 pad.1@-62.55,-17.75 U104.5 | length 1.8
  Bottom Layer LF-Signals w0.2: pad.1@-62.55,-17.75 -62.55,-18.625 -62.3,-18.875 -62.3,-19.45
NetL102_1: L102.1 pad.0@-62.275,-8.5 U104.14 | length 3.8
  Bottom Layer LF-Signals w0.2: pad.0@-62.275,-8.5 -62.275,-7.267 -62.043,-7.035 L102.1@-60.425,-7.035 L102.1@-60.857,-7.467
NetQ102_3: Q102.3 R104.1 R105.2 | length 5.3
  Bottom Layer LF-Signals w0.18: Q102.3@-66.013,-8.287 Q102.3@-65.575,-8.287 -65.437,-8.425 -65.025,-8.425 -65.025,-9.85 R104.1@-65.9,-10.725
  Bottom Layer LF-Signals w0.2: R105.2@-67.15,-7.15 Q102.3@-66.013,-8.287
NetQ104_1: pad.3@-15.9,-16.225 Q104.1 Q105.3 R114.1 | length 5.5
  Bottom Layer LF-Signals w0.175: R114.1@-16.9,-11.925 -16.425,-12.4 Q104.1@-15.55,-12.4 Q105.3@-15.55,-15 -15.55,-15.875 pad.3@-15.9,-16.225
NetQ105_1: pad.3@-13.125,-12.675 Q105.1 R115.1 R119.2 | length 4.9
  Bottom Layer LF-Signals w0.175: Q105.1@-13.45,-14.05 -12.65,-14.05 R119.2@-11.8,-14.9 -11.75,-14.85 R115.1@-10.45,-14.85
  Bottom Layer LF-Signals w0.18: Q105.1@-13.45,-14.05 -13.125,-13.725 pad.3@-13.125,-12.675
NetQ107_3: pad.3@-87.05,-15.825 Q107.3 R129.1 | length 3.5
  Bottom Layer LF-Signals w0.175: R129.1@-88.175,-14.625 -87.45,-14.625 -87.05,-15.025 pad.3@-87.05,-15.825 -86.7,-15.475 Q107.3@-85.825,-15.475
NetQ900_3: pad.3@-3.075,-6.55 Q900.3 R908.1 | length 3.8
  Bottom Layer LF-Signals w0.175: pad.3@-3.075,-6.55 Q900.3@-3.075,-7.875 -3.075,-8.425 R908.1@-1.7,-9.8
NetQ900_6: pad.3@-5.45,-12.3 Q900.6 R907.1 | length 3
  Bottom Layer LF-Signals w0.175: pad.3@-5.45,-12.3 -4.6,-11.45 -4.6,-11.1 -4.375,-10.875 Q900.6@-4.375,-9.725
NetR101_2: pad.3@-71.3,-21.875 R101.2 U100.4 | length 2.9
  Bottom Layer LF-Signals w0.175: R101.2@-71.3,-23.075 pad.3@-71.3,-21.975 ; pad.3@-71.25,-21.925 pad.3@-71.3,-21.975 ; U100.4@-70.175,-21.15 -70.175,-21.625 -70.525,-21.975 pad.3@-71.3,-21.975
NetR109_2: pad.3@-73.3,-4.675 R109.2 R112.2 U101.8 | length 7.4
  Bottom Layer LF-Signals w0.3: pad.3@-73.3,-4.675 -73.3,-3.975 -72.7,-3.375 U101.8@-70.063,-3.375 ; U101.8@-70.05,-3.388 R112.2@-70.05,-4.675 -68.975,-4.675 -68.4,-4.1 R109.2@-68.375,-4.1
NetR110_1: R110.1 SW100.3 SW100.4 TP100.1 | length 10
  Top Layer LF-Signals w0.15: v4(-24.925,-1.5) -24.3,-1.5 -24,-1.8 SW100.4@-24,-2.15 SW100.3@-24,-7.65 R110.1@-24,-9.7
  Bottom Layer LF-Signals w0.15: TP100.1@-26,-1.5 v4(-24.925,-1.5)
NetR113_1: pad.3@-16.275,-4.125 R113.1 U102.1 | length 7.2
  Bottom Layer LF-Signals w0.175: R113.1@-20.6,-3.525 -16.875,-3.525 pad.3@-16.275,-4.125 -16.275,-6.15 U102.1@-15.625,-6.15
NetR118_2: pad.3@-15.625,-9.075 R118.2 U102.4 | length 2.2
  Bottom Layer LF-Signals w0.175: U102.4@-15.625,-8.1 pad.3@-15.625,-9.075 R118.2@-14.4,-9.075
NetR120_2: pad.3@-29.85,-7.075 R120.2 U103.3 | length 2.3
  Bottom Layer LF-Signals w0.175: pad.3@-29.85,-7.075 R120.2@-28.95,-7.075 -27.878,-7.075 U103.3@-27.678,-6.875
NetR128_1: R128.1 R130.2 U104.21 | length 7.7
  Top Layer LF-Signals w0.175: v1(-53.55,-12.8) -50.925,-12.8 -49.838,-11.713 v3(-48.9,-11.713)
  Bottom Layer LF-Signals w0.175: U104.21@-54.35,-12.95 -54.25,-12.85 -53.6,-12.85 v1(-53.55,-12.8) ; R130.2@-50.675,-11.713 R128.1@-49.775,-11.713 v3(-48.9,-11.713)
NetR132_1: R132.1 R133.2 U104.22 | length 7.8
  Top Layer LF-Signals w0.175: v1(-53.55,-13.575) -51.075,-13.575 -49.919,-14.731 v3(-48.9,-14.731)
  Bottom Layer LF-Signals w0.175: U104.22@-54.35,-13.45 -54.225,-13.575 v1(-53.55,-13.575) ; R133.2@-50.675,-14.731 R132.1@-49.775,-14.731 v3(-48.9,-14.731)
NetR200_2: R200.2 U800.1 | length 8.3
  Top Layer LF-Signals w0.175: U800.1@-75,-105.625 -70.5,-105.625 v3(-68.875,-104) R200.2@-67.325,-104
NetR206_1: R206.1 U900.J4 | length 61.9
  Signal Layer 1 w0.18: v3(-42.53,-25.675) -42.53,-34.98 -42.975,-35.425 -42.975,-39.2 -41.76,-40.415 -41.76,-58.44 -41.1,-59.1 -41.1,-62.325 -41.725,-62.95 v1(-41.725,-66.8)
  Bottom Layer LF-Signals w0.125: -28.475,-18.775 -27.678,-18.775
  Bottom Layer LF-Signals w0.15: -27.678,-18.775 -27.5,-18.775 U900.J4@-27.175,-18.45
  Bottom Layer LF-Signals w0.18: v3(-42.53,-25.675) -38.005,-21.15 -30.875,-21.15 -29.65,-19.925 -29.625,-19.925 -28.475,-18.775 ; v1@-41.728,-66.797 R206.1@-41.728,-65.549
NetR223_2: R223.2 R226.2 U800.30 | length 8.6
  Top Layer LF-Signals w0.15: U800.30@-74.35,-107.075 -73.799,-107.075 -73.499,-106.775 v3(-68.525,-106.775) -67.85,-107.45 R223.2@-67.325,-107.45 R226.2@-67.325,-108.6
NetR224_2: R224.2 U800.29 | length 9.4
  Top Layer LF-Signals w0.15: U800.29@-74.35,-107.475 -73.775,-107.475 -73.5,-107.2 -68.875,-107.2 -68.425,-107.65 v3(-68.425,-109.75) R224.2@-67.325,-109.75
NetR225_2: R225.2 R817.2 | length 1.7
  Top Layer LF-Signals w0.185: R225.2@-58.8,-83.675 -58.8,-85.275 R817.2@-58.75,-85.325
  other v3: -58.8,-84.475
NetR228_2: R228.2 U800.31 | length 7.4
  Top Layer LF-Signals w0.15: U800.31@-74.35,-106.675 -73.824,-106.675 -73.499,-106.35 -69.9,-106.35 v3(-69.625,-106.075) -67.55,-106.075 R228.2@-67.325,-106.3
NetR229_2: R229.2 U800.32 | length 7.5
  Top Layer LF-Signals w0.15: U800.32@-74.35,-106.275 -73.848,-106.275 -73.598,-106.025 -70.425,-106.025 -69.55,-105.15 v3(-68.295,-105.15) R229.2@-67.325,-105.15
NetR230_2: R230.2 U801.5 | length 4.9
  Top Layer LF-Signals w0.175: U801.5@-57.55,-87.1 -57.55,-88.4 v3(-57.275,-88.675) R230.2@-54.1,-88.675
NetR300_1: R300.1 SW300.3 SW300.4 TP300.1 | length 11.9
  Top Layer LF-Signals w0.175: R300.1@-31.15,-9.85 -31,-9.7 SW300.3@-31,-7.65 SW300.4@-31,-2.15 -31,-1.925 -30.55,-1.475 -30.5,-1.525 v4(-30.075,-1.525)
  Bottom Layer LF-Signals w0.175: TP300.1@-32.825,-1.475 -30.125,-1.475 v4(-30.075,-1.525)
NetR301_1: R301.1 SW301.3 SW301.4 | length 7.3
  Top Layer LF-Signals w0.175: SW301.4@-83.85,-18.95 SW301.3@-83.85,-24.45 -82.075,-24.45 R301.1@-82.05,-24.425
  other v3: -83.85,-21.725
NetR704_2: R704.2 U700.31 | length 2.6
  Top Layer LF-Signals w0.175: R704.2@-13.35,-97.25 -13.125,-97.475 v3(-12.225,-97.475) -11.875,-97.125 U700.31@-11.025,-97.125
NetR800_1: R800.1 U800.15 | length 13.5
  Top Layer LF-Signals w0.175: R800.1@-83.075,-113.65 -83.725,-113.65 v3(-85.675,-111.7) -85.675,-109.025 -85.325,-108.675 U800.15@-78.45,-108.675
NetR801_2: R801.2 U800.28 | length 2
  Top Layer LF-Signals w0.15: v3(-73.1,-108.65) R801.2@-73.1,-107.875
  Top Layer LF-Signals w0.175: U800.28@-74.35,-107.875 R801.2@-73.1,-107.875
NetR802_1: R802.1 U800.13 | length 9.9
  Top Layer LF-Signals w0.175: v1(-82.05,-107.95) -81.663,-108.337 -79.202,-108.337 -79.063,-108.198 -79.063,-108.088 -78.85,-107.875 U800.13@-78.45,-107.875 ; R802.1@-81.725,-113.65 v3(-81.725,-112.525)
  Signal Layer 2 w0.175: v1(-82.05,-107.95) -81.725,-108.275 v3(-81.725,-112.525)
NetR806_2: R806.2 U800.25 | length 5.2
  Top Layer LF-Signals w0.175: U800.25@-74.35,-109.075 -74.35,-109.7 -74.025,-110.025 -72.05,-110.025 v3(-71.075,-111) R806.2@-70.3,-111
NetR811_2: R811.2 U800.27 | length 8.3
  Top Layer LF-Signals w0.175: U800.27@-74.35,-108.275 -73.925,-108.275 -73.65,-108.55 -73.65,-109.287 -73.287,-109.65 -70.45,-109.65 v3(-69.175,-110.925) R811.2@-68.075,-112.025
NetR817_1: R817.1 U801.3 | length 3.4
  Top Layer LF-Signals w0.175: v3(-57.175,-84.4) -57.175,-84.95 R817.1@-57.55,-85.325 -56.975,-85.9 -56.75,-85.9 -56.55,-86.1 U801.3@-56.55,-87.1
NetR818_2: R818.2 U801.8 | length 2.7
  Top Layer LF-Signals w0.175: U801.8@-56.55,-91.1 -56.55,-92.775 R818.2@-56.5,-92.825 v3@-55.55,-92.825
  other v3: -55.55,-92.83
P\H\Y\_\R\E\S\E\T\: C713.1 R702.1 U200.90 U700.28 | length 67.6
  Top Layer LF-Signals w0.175: U200.90@-34.4,-50.25 -34.375,-50.225 -24.2,-50.225 -21.3,-53.125 -21.3,-61.45 -20.775,-61.975 -18.05,-61.975 -16.3,-63.725 -16.3,-76.25 -16.275,-76.225 v1(-16.275,-76.2) ; v3@-16.875,-94.6 R702.1@-16.875,-95.975 -15.8,-95.975 -15.8,-95.9 C713.1@-15.75,-95.85 ; C713.1@-15.75,-96.025 C713.1@-15.75,-95.85 ; U700.28@-11.025,-95.625 -11.65,-95.625 -11.688,-95.587 -12.637,-95.587 -12.8,-95.425 -15.325,-95.425 C713.1@-15.75,-95.85
  Bottom Layer LF-Signals w0.175: v3@-16.875,-94.6 -16.875,-76.8 v1(-16.275,-76.2)
  other v3: -16.861,-94.586
PA00: J401.7@-6.97,-36.35 J503.3@-19.67,-63.274 U200.102 | length 51.7
  Top Layer LF-Signals w0.175: U200.102@-34.4,-44.25 -33.175,-44.25 -32.025,-43.1 v1(-21.75,-43.1) -21.19,-42.54 -17.92,-42.54 -11.73,-36.35 J401.7@-6.97,-36.35
  Signal Layer 1 w0.175: v1(-21.75,-43.1) -21.75,-61.194 J503.3@-19.67,-63.274
PA01: R134.1 U104.3 U200.99 | length 63.5
  Top Layer LF-Signals w0.18: v1(-35.952,-45.752) -34.448,-45.752 -34.423,-45.727 U200.99@-34.4,-45.75
  Signal Layer 1 w0.175: v1(-58.771,-47.2) -58.771,-42.104 -61.732,-39.143 -61.732,-23.957 -55,-17.225 v3(-54.325,-17.225)
  Signal Layer 2 w0.15: -51.377,-45.752 v1(-35.952,-45.752)
  Signal Layer 2 w0.175: v1(-58.771,-47.2) -58.398,-46.827 -52.452,-46.827 -51.377,-45.752
  Bottom Layer LF-Signals w0.175: U104.3@-56.05,-15.15 -56.05,-15.775 -55.087,-16.738 -54.812,-16.738 v3(-54.325,-17.225) R134.1@-54.325,-18.1
PA02: J402.9@-6.97,-74.45 J404.45 J405.16 J503.8@-19.67,-50.574 R914.1 U200.93 | length 161.1
  Top Layer LF-Signals w0.15: J404.45@-86.15,-89.1 -84.35,-89.1 -83.475,-88.225 -83.475,-86.75 -82.925,-86.2 J405.16@-80.87,-86.2 v1(-79.25,-86.2)
  Top Layer LF-Signals w0.175: U200.93@-34.4,-48.75 -23.695,-48.75 -21.871,-50.574 J503.8@-19.67,-50.574
  Signal Layer 1 w0.18: J503.8@-19.67,-50.574 -14.576,-50.574 -11.35,-53.8 -11.35,-66.85 -7.575,-70.625 -6.35,-70.625 -5.725,-71.25 -5.725,-73.205 J402.9@-6.97,-74.45
  Signal Layer 2 w0.15: v1(-79.25,-86.2) -74.625,-86.2 -73.35,-84.925 -62.9,-84.925 -61.625,-83.65 -22.425,-83.65 -21.225,-82.45 -14.97,-82.45 J402.9@-6.97,-74.45
  Bottom Layer LF-Signals w0.175: R914.1@-22.184,-28.668 -22.184,-36.602 -21.211,-37.575 -19.1,-37.575 -17.9,-38.775 -17.9,-48.804 J503.8@-19.67,-50.574